# Altium PCB MCU_V2.PcbDoc
Units mm, origin at the board's own origin, x right, y up, seen from the top; angles counter-clockwise.
Board outline 47.6 x 56 mm, 2 copper layers (Top Layer, Bottom Layer); 61 components, 52 nets, 229 pads, 67 vias.
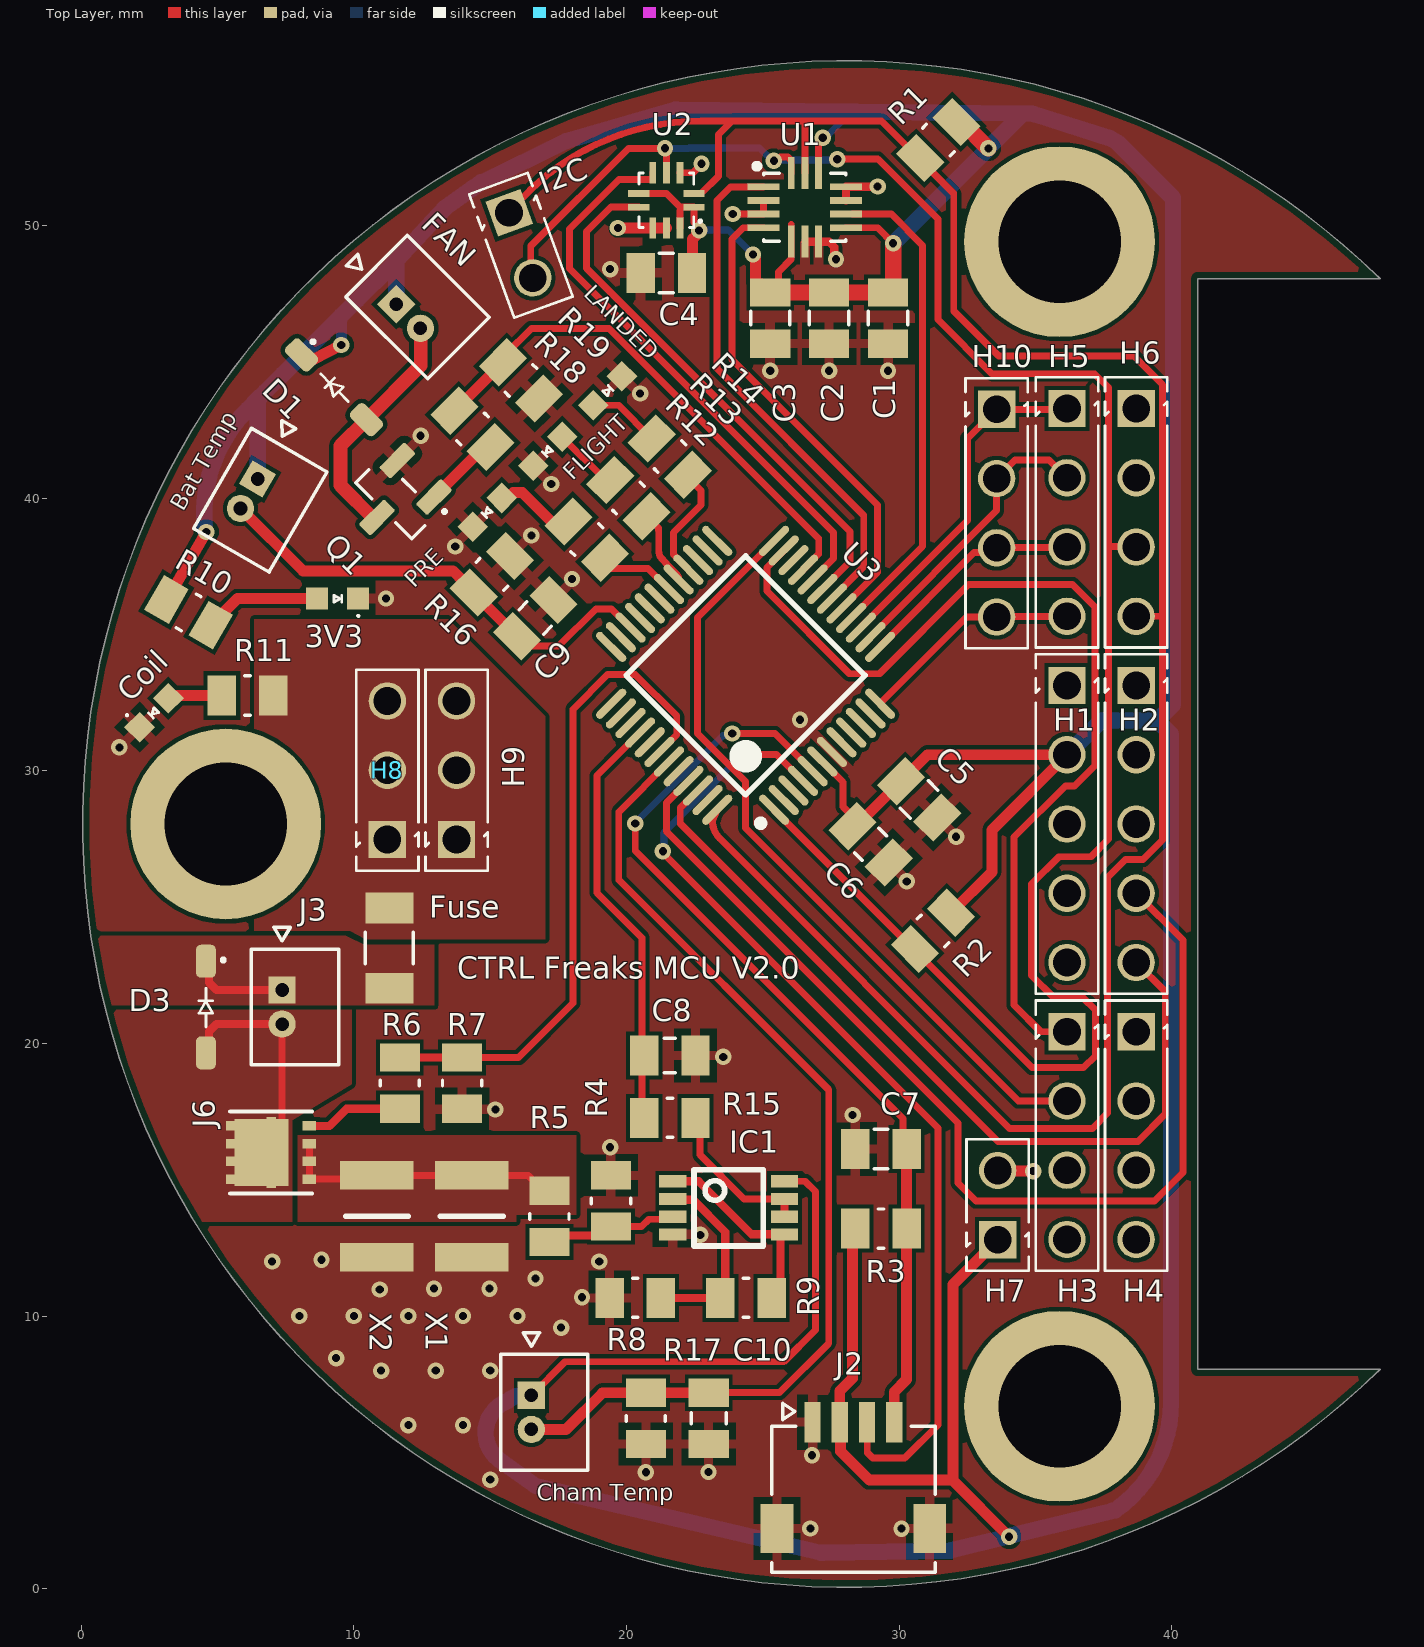
[diagram p0: Top Layer view]
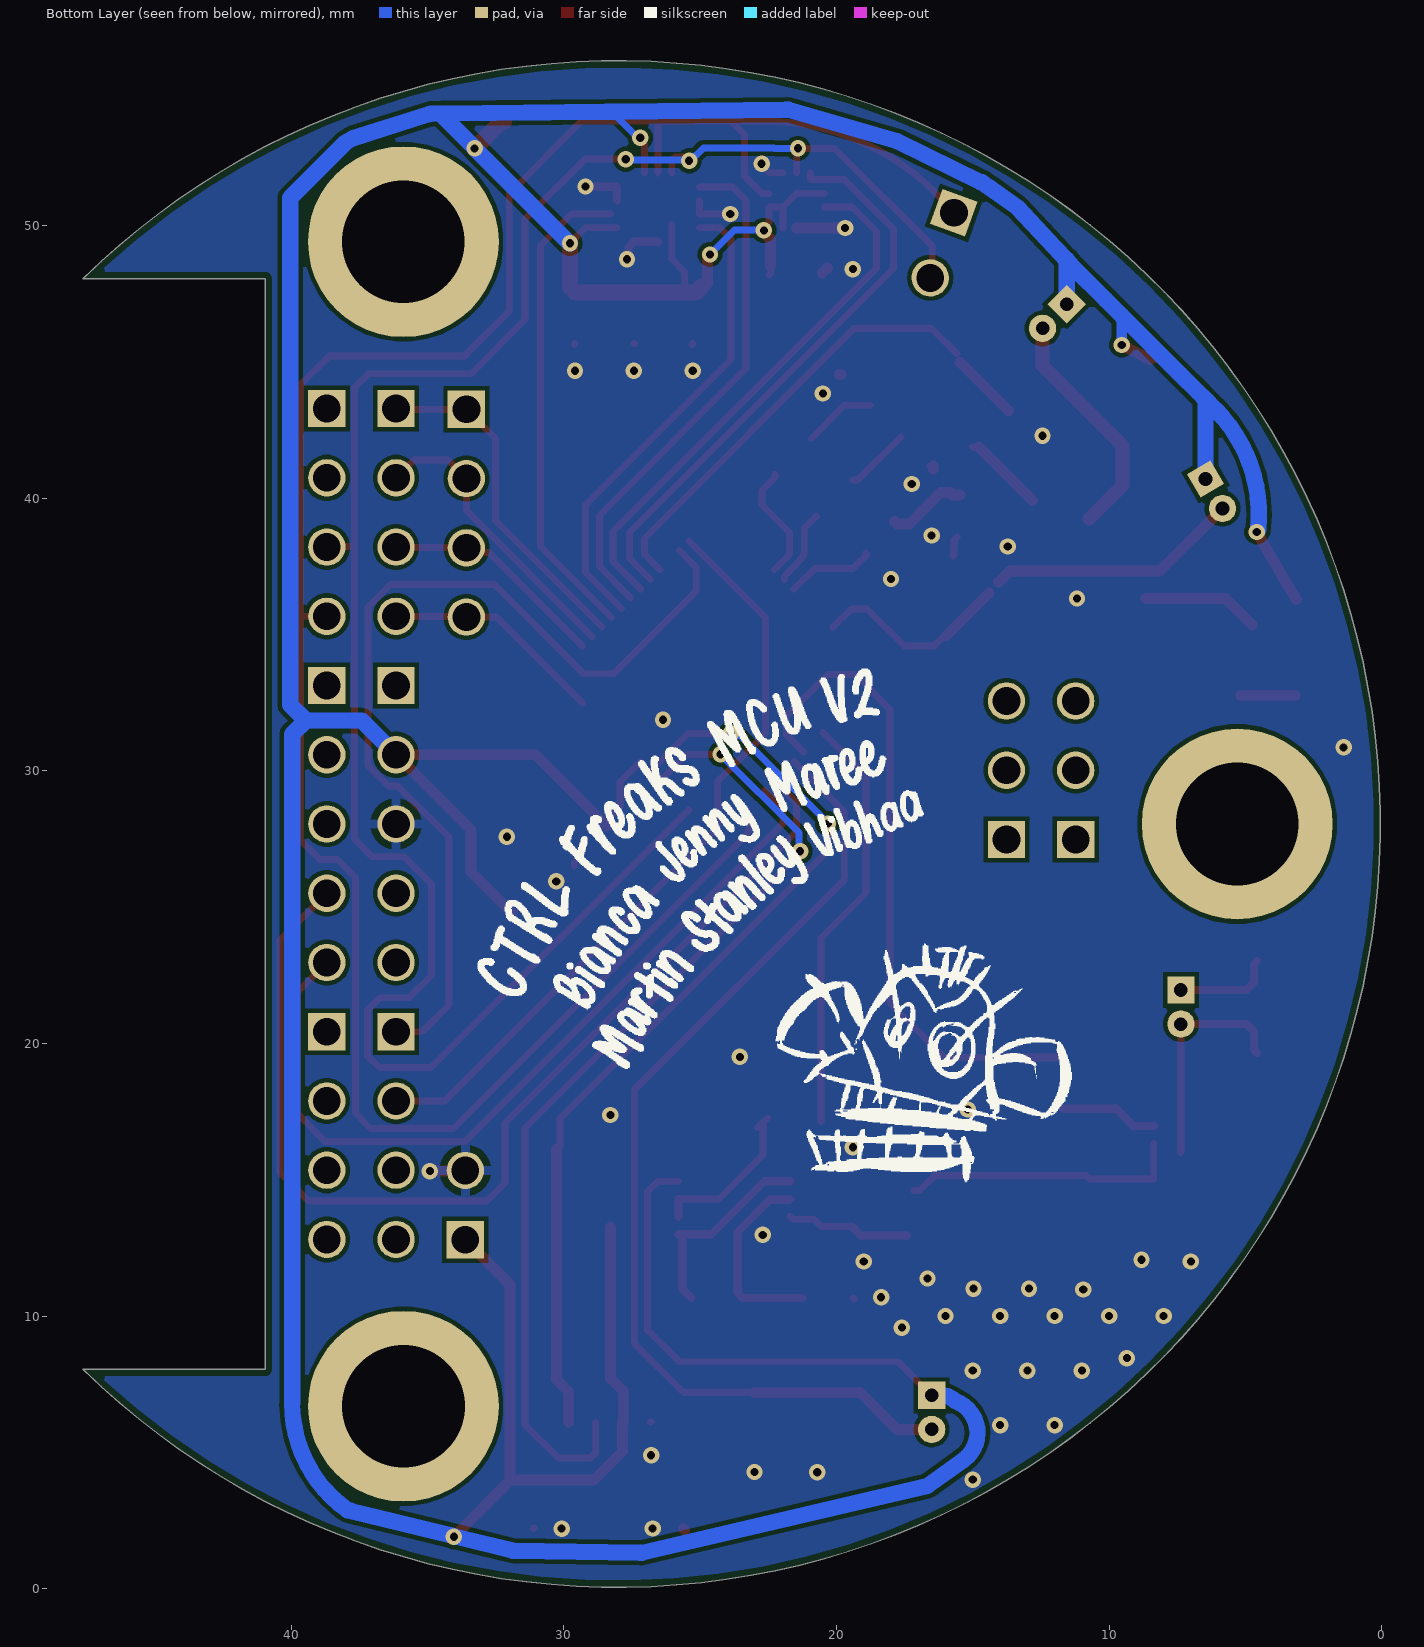
[diagram p1: Bottom Layer view, seen from below]
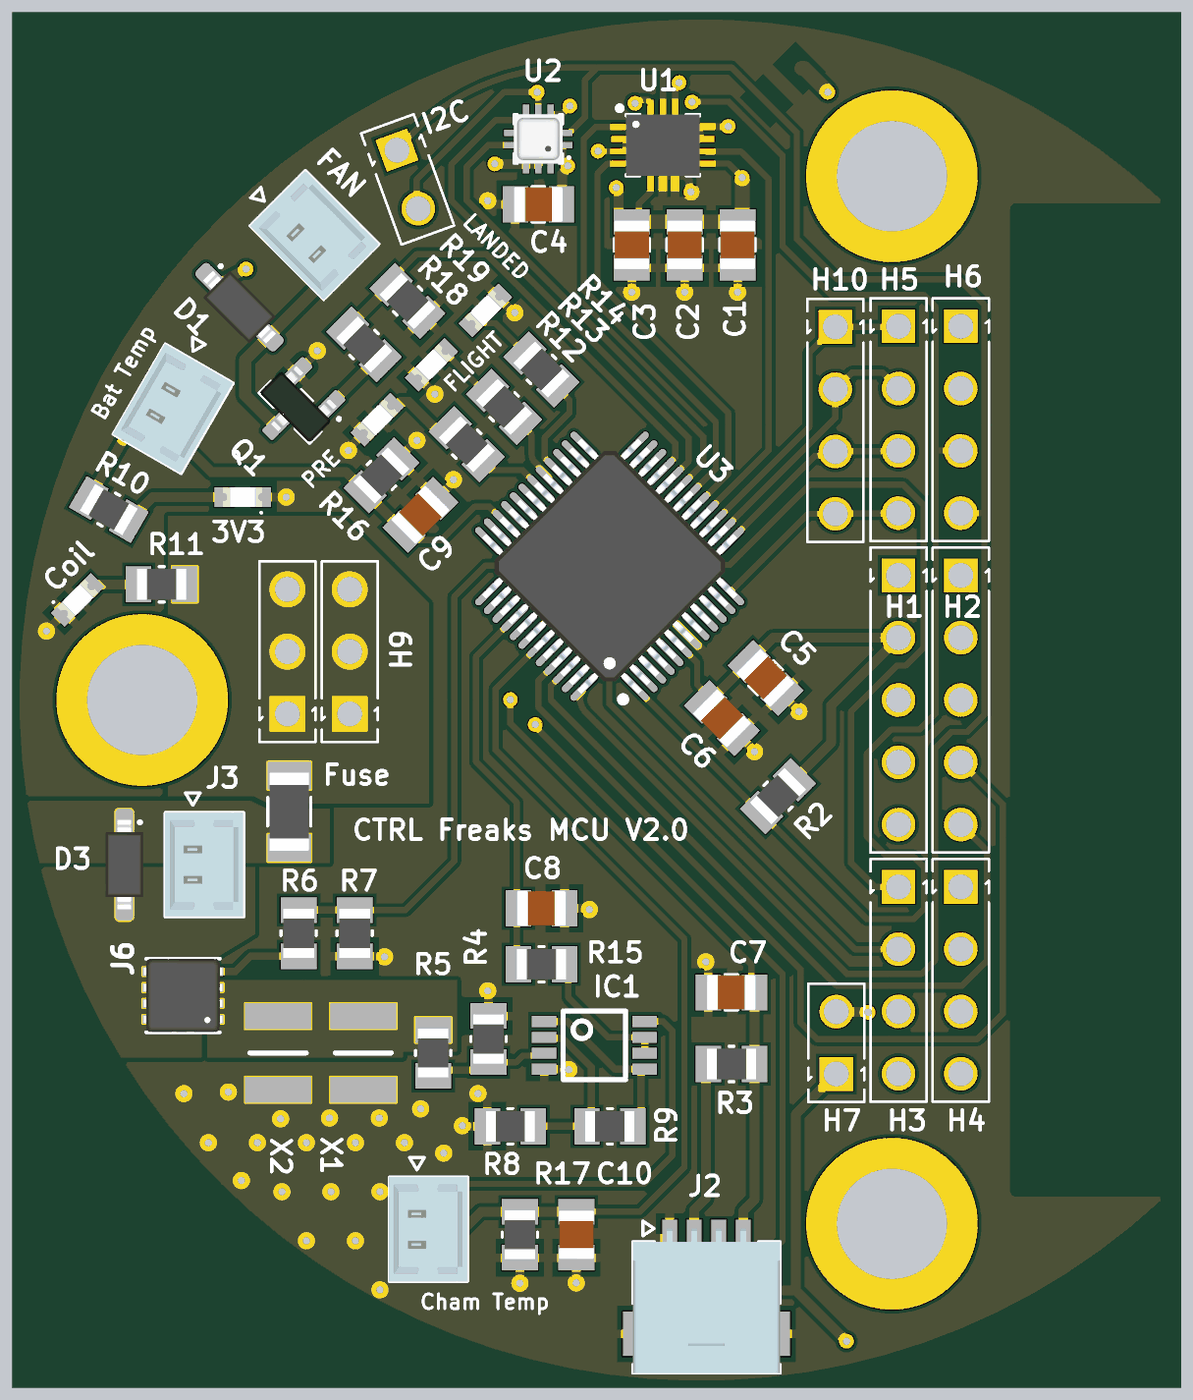
[diagram p2: 3D render of the assembled board from above, using the file's embedded part models]

## Layer stack, top to bottom
Top Solder: solder mask 0.0102, Solder Resist, Dk 3.5
Top Layer: signal copper 0.0356
Dielectric 1: dielectric 0.32, FR-4, Dk 4.8
Bottom Layer: signal copper 0.0356
Bottom Solder: solder mask 0.0102, Solder Resist, Dk 3.5

## Board outline
47.646,8.05 cw(c28.05,28.05) 47.646,48.05 47.65,48.05 40.963,48.05 40.963,8.05

## Design rules (kind name [scope] priority, off if disabled: settings)
BoardOutlineClearance [All] p1: gap=0.254 ignorepadtopadclearanceinfootprint=FALSE except(0: Arc-SplitContinuation Track-SplitContinuation SMDPad-SplitContinuation THPad-SplitContinuation Via-SplitContinuation Fill-SplitContinuation Poly-SplitContinuation Region-SplitContinuation Text-SplitContinuation)
Clearance [All] p1: gap=0.152 ignorepadtopadclearanceinfootprint=FALSE
ComponentClearance [All] p1: gap=0.1 collisioncheckmode=3 verticalgap=0.254 showdistances=FALSE
HoleSize [All] p1: absolutevalues=TRUE maxlimit=6.2 minlimit=0.3 maxpercent=80.000 minpercent=20.000
MinimumAnnularRing [All] p1: minimumring=0.15
MinimumSolderMaskSliver [All] p1: minsoldermaskwidth=0.1
PolygonConnect GND_SHUNT_RES [(InNet('GND') AND InComponent('X1') OR InComponent('X2'))] p1: connectstyle=Direct reliefconductorwidth=0.254 reliefentries=4 polygonreliefangle="90 Angle" airgapwidth=0.254 // Direct connect for GND Net on SHUNT
PolygonConnect HIGH-CURRENT [(InNet('V_Coil') OR InNet('NetD3_C') OR InNet('NetD3_A') OR InNet('Isense'))] p2: connectstyle=Direct reliefconductorwidth=0.254 reliefentries=4 polygonreliefangle="90 Angle" airgapwidth=0.254 // CUSTOM
PolygonConnect ViaConnect [IsVia] p3: connectstyle=Direct reliefconductorwidth=0.254 reliefentries=4 polygonreliefangle="90 Angle" airgapwidth=0.254
PolygonConnect [All] p4: connectstyle=Relief reliefconductorwidth=0.35 reliefentries=4 polygonreliefangle="90 Angle" airgapwidth=0.254
RoutingVias [All] p1: holewidth=0.3 width=0.6 viastyle="Through Hole" minholewidth=0.3 minwidth=0.5 maxholewidth=1 maxwidth=5
SilkToSilkClearance [All] p1: silktosilkclearance=0.1
SilkToSolderMaskClearance [IsPad] p1: minsilkscreentomaskgap=0.1 clearancetoexposedcopper=TRUE
SolderMaskExpansion [All] p1: expansion=0.051 istentingtop=FALSE
SupplyNets "Schematic Supply Nets_1" [InNet('V_Coil')] p1: voltage=0.000
SupplyNets "Schematic Supply Nets_10" [InNet('LED_2')] p2: voltage=0.000
SupplyNets "Schematic Supply Nets_6" [InNet('LED_1')] p3: voltage=0.000
SupplyNets "Schematic Supply Nets" [InNet('LED_3')] p4: voltage=0.000
SupplyNets "Schematic Supply Nets_7" [InNet('3V3')] p5: voltage=0.000
SupplyNets "Schematic Supply Nets_3" [InNet('GND')] p6: voltage=0.000
Width [All] p1: maxlimit=25.4 minlimit=0.15 preferedwidth=0.254 minimp=50.000000 maximp=50.000000 favimp=50.000000
25 further rules are at their usual default settings.

## Components (designator, comment, footprint, x,y, rotation, side; value= is the part's Value field where it differs from the comment)
3V3 "LTST-C190 Series" LED_0603_1608M_0.80mm 9.398,36.322 r180 top
"Bat Temp" "0530470210" MOLEX_0530470210 6.155,40.165 r60 top (schematic designator J4)
C1 "0.1uF" CAPACITOR_0805_2012M-70N 29.59,46.609 r90 top
C2 "2.2 uF" CAPACITOR_0805_2012M-70N 27.432,46.609 r90 top
C3 "10 nF" CAPACITOR_0805_2012M-70N 25.273,46.609 r90 top
C4 "0.1uF" CAPACITOR_0805_2012M-70N 21.463,48.26 r0 top
C5 "100nF" CAPACITOR_0805_2012M-70N 30.734,28.956 r135 top
C6 "22uF" CAPACITOR_0805_2012M-70N 28.956,27.305 r135 top
C7 "1nF" CAPACITOR_0805_2012M-70N 29.337,16.129 r0 top
C8 "22uF" CAPACITOR_0805_2012M-70N 21.59,19.558 r180 top
C9 "22uF" CAPACITOR_0805_2012M-70N 16.653,35.603 r225 top
C10 "22uF" CAPACITOR_0805_2012M-70N 23.016,6.249 r90 top
"Cham Temp" "0530470210" MOLEX_0530470210 16.51,6.467 r90 top (schematic designator J5)
Coil "LTST-C190 Series" LED_0603_1608M_0.80mm 2.667,32.131 r45 top
D1 "1N4148W-TP" SOD123-1.35mm-N 9.271,44.069 r315 top
D3 "1N4148W-TP" SOD123-1.35mm-N 4.572,21.336 r270 top
FAN "0530470210" MOLEX_0530470210 11.999,46.675 r135 top (schematic designator J1)
FLIGHT "LTST-C190 Series" LED_0603_1608M_0.80mm 17.109,41.721 r45 top
Fuse "SF-1206HH10M-2" RESISTOR_1206_3216M_55N 11.303,23.495 r90 top
H1 "HDR,2.54mm,1x5" HEADER_2.54MM_1x5PIN 36.157,28.05 r270 top locked
H2 "HDR,2.54mm,1x5" HEADER_2.54MM_1x5PIN 38.697,28.05 r270 top locked
H3 "HDR,2.54mm,1x4" HEADER_2.54MM_1x4PIN 36.157,16.62 r270 top locked
H4 "HDR,2.54mm,1x4" HEADER_2.54MM_1x4PIN 38.697,16.62 r270 top locked
H5 "HDR,2.54mm,1x4" HEADER_2.54MM_1x4PIN 36.157,39.48 r270 top locked
H6 "HDR,2.54mm,1x4" HEADER_2.54MM_1x4PIN 38.697,39.48 r270 top locked
H7 "HDR,2.54mm,1x2" HEADER_2.54MM_1x2PIN 33.617,14.072 r90 top locked
H8 "HDR,2.54mm,1x3" HEADER_2.54MM_1x3PIN 11.226,30.022 r90 top locked
H9 "HDR,2.54mm,1x3" HEADER_2.54MM_1x3PIN 13.766,30.022 r90 top
H10 "HDR,2.54mm,1x4" HEADER_2.54MM_1x4PIN 33.578,39.452 r270 top locked
I2C "HDR,2.54mm,1x2" HEADER_2.54MM_1x2PIN 16.129,49.276 r290 top
IC1 "NCS2333DMR2G" *MSOP8 23.749,13.97 r270 top
J2 "5015680407" MOLEX_5015680407 28.321,3.556 r0 top
J3 "0530470210" MOLEX_0530470210 7.366,21.336 r90 top
J6 "AON7524" DFN3X3A-8LEP1 6.964,16.002 r90 top
LANDED "LTST-C190 Series" LED_0603_1608M_0.80mm 19.304,43.942 r225 top
PRE "LTST-C190 Series" LED_0603_1608M_0.80mm 14.895,39.48 r45 top
Q1 "AS2312" SOT23-3N-1.15mm 11.557,40.005 r225 top
R1 "4.7k" Resistor_0805_2012M-50N 31.441,53.142 r45 top
R2 "4.7k" Resistor_0805_2012M-50N 31.242,24.13 r45 top
R3 "47k" Resistor_0805_2012M-50N 29.337,13.208 r180 top
R4 "*" RESISTOR_0805_2012M-50N 19.431,14.224 r90 top
R5 "*" RESISTOR_0805_2012M-50N 17.171,13.659 r90 top
R6 "*" RESISTOR_0805_2012M-50N 11.684,18.542 r270 top
R7 "*" RESISTOR_0805_2012M-50N 13.97,18.542 r90 top
R8 "*" RESISTOR_0805_2012M-50N 20.32,10.668 r180 top
R9 "*" RESISTOR_0805_2012M-50N 24.384,10.668 r0 top
R10 "*" RESISTOR_0805_2012M-50N 3.937,35.814 r150 top
R11 "*" RESISTOR_0805_2012M-50N 6.096,32.766 r0 top
R12 "*" RESISTOR_0805_2012M-50N 18.542,38.481 r315 top
R13 "*" RESISTOR_0805_2012M-50N 20.066,40.005 r315 top
R14 "*" RESISTOR_0805_2012M-50N 21.59,41.529 r315 top
R15 "*" Resistor_0805_2012M-50N 21.59,17.272 r180 top
R16 "10k" RESISTOR_0805_2012M-50N 15.062,37.211 r225 top
R17 "*" RESISTOR_0805_2012M-50N 20.709,6.249 r90 top
R18 "*" RESISTOR_0805_2012M-50N 14.351,42.545 r315 top
R19 "*" RESISTOR_0805_2012M-50N 16.129,44.323 r135 top
U1 "ICM-42670-P" XDCR_ICM-42670-P-EXTENDED_PADS 26.543,50.673 r0 top
U2 "BMP390" BMP390 21.462,50.927 r270 top
U3 "MSP430FR2355TPT" LQFP_PT_48_N 24.371,33.505 r135 top
X1 "RCWE1210R100FKEA" RESC3125X70N 14.321,13.659 r90 top
X2 "RCWE1210R100FKEA" RESC3125X70N 10.846,13.659 r90 top

## Footprints (in the part's own frame and the unit in brackets; to place one, negate y for a bottom-side part, rotate by r counter-clockwise, add the part's x,y. Pads: shape width x height; smd on the part's side, far side on the other; paste and mask are expansions set on the pad)
*MSOP8 [mm]
  rect 0.45x1 smd: 1(-0.975,-2.05) 2(-0.325,-2.05) 3(0.325,-2.05) 4(0.975,-2.05) 5(0.975,2.05) 6(0.325,2.05) 7(-0.325,2.05) 8(-0.975,2.05)
  silkscreen extent -1.4,-1.27 1.4,1.27
BMP390 [mm]
  rect 0.25x0.775 smd mask+0.051: 1(0.25,1.013) 2(-0.25,1.013) 6(-0.25,-1.013) 7(0.25,-1.013)
  rect 0.775x0.25 smd mask+0.051: 3(-1.013,0.5) 4(-1.013,0) 5(-1.013,-0.5) 8(1.013,-0.5) 9(1.013,0) 10(1.013,0.5)
  silkscreen extent -1,-1 1,1.29, body extent -1,-1 1,1, height 0.8
CAPACITOR_0805_2012M-70N [mm] "Capacitor, 0805 (2012 metric), 0.7mm high, nominal pads,"
  rect 1.04x1.47 smd mask+0.051: 1(-0.94,0) 2(0.94,0)
  silkscreen extent -0.25,-0.72 0.25,0.72, body extent -1,-0.73 1,0.73, height 1.23
DFN3X3A-8LEP1 [mm]
  rect 0.35x0.5 smd: P$1(-0.975,-1.4) P$2(-0.325,-1.4) P$3(0.325,-1.4) P$4(0.975,-1.4) P$5(0.975,1.4) P$6(0.325,1.4) P$7(-0.325,1.4) P$8(-0.975,1.4)
  rect 0.5x0.35 smd: P$9(1.05,0) P$10(-1.05,0)
  rect 2.45x1.98 smd: P$11(0,0.36)
  silkscreen extent -1.5,-1.5 1.5,1.5, body extent -1.55,-1.6 1.55,1.6, height 0.9
HEADER_2.54MM_1x2PIN [mm]
  rect 1.37x1.37 hole 1.02: 1(-1.27,0)
  round 1.37 hole 1.02: 2(1.27,0)
  silkscreen extent -2.41,-1.14 2.41,1.14, body extent -2.41,-1.14 2.41,1.14, height 8.2
HEADER_2.54MM_1x3PIN [mm]
  rect 1.37x1.37 hole 1.02: 1(-2.54,0)
  round 1.37 hole 1.02: 2(0,0) 3(2.54,0)
  silkscreen extent -3.68,-1.14 3.68,1.14, body extent -3.68,-1.14 3.68,1.14, height 8.2
HEADER_2.54MM_1x4PIN [mm]
  rect 1.37x1.37 hole 1.02: 1(-3.81,0)
  round 1.37 hole 1.02: 2(-1.27,0) 3(1.27,0) 4(3.81,0)
  silkscreen extent -4.95,-1.14 4.95,1.14, body extent -4.95,-1.14 4.95,1.14, height 8.2
HEADER_2.54MM_1x5PIN [mm]
  rect 1.37x1.37 hole 1.02: 1(-5.08,0)
  round 1.37 hole 1.02: 2(-2.54,0) 3(0,0) 4(2.54,0) 5(5.08,0)
  silkscreen extent -6.22,-1.14 6.22,1.14, body extent -6.21,-1.14 6.22,1.14, height 8.2
LED_0603_1608M_0.80mm [mm] "LED, 0603 (1608 metric), 0.8mm high"
  rect 0.8x0.8 smd mask+0.051: A(0.75,0) C(-0.75,0)
  silkscreen extent -0.79,-0.12 0.13,0.66, body extent -0.8,-0.4 0.8,0.4, height 0.8
LQFP_PT_48_N [mm]
  oval 1.45x0.28 smd paste+0 mask+0.051: 1(-4.225,2.75) 2(-4.225,2.25) 3(-4.225,1.75) 4(-4.225,1.25) 5(-4.225,0.75) 6(-4.225,0.25) 7(-4.225,-0.25) 8(-4.225,-0.75) 9(-4.225,-1.25) 10(-4.225,-1.75) 11(-4.225,-2.25) 12(-4.225,-2.75) 25(4.225,-2.75) 26(4.225,-2.25) 27(4.225,-1.75) 28(4.225,-1.25) 29(4.225,-0.75) 30(4.225,-0.25) 31(4.225,0.25) 32(4.225,0.75) 33(4.225,1.25) 34(4.225,1.75) 35(4.225,2.25) 36(4.225,2.75)
  oval 0.28x1.45 smd paste+0 mask+0.051: 13(-2.75,-4.225) 14(-2.25,-4.225) 15(-1.75,-4.225) 16(-1.25,-4.225) 17(-0.75,-4.225) 18(-0.25,-4.225) 19(0.25,-4.225) 20(0.75,-4.225) 21(1.25,-4.225) 22(1.75,-4.225) 23(2.25,-4.225) 24(2.75,-4.225) 37(2.75,4.225) 38(2.25,4.225) 39(1.75,4.225) 40(1.25,4.225) 41(0.75,4.225) 42(0.25,4.225) 43(-0.25,4.225) 44(-0.75,4.225) 45(-1.25,4.225) 46(-1.75,4.225) 47(-2.25,4.225) 48(-2.75,4.225)
  silkscreen extent -4.35,-3.1 3.1,3.57, body extent -4.5,-4.5 4.5,4.5, height 1.6
MOLEX_0530470210 [mm]
  rect 1x1 hole 0.5 mask+0.051: 1(0.625,0)
  round 1 hole 0.5 mask+0.051: 2(-0.625,0)
  silkscreen extent -2.12,-2.08 2.93,1.12, body extent -2.12,-2.06 2.13,1.14, height 4.21
MOLEX_5015680407 [mm] "Header - Picoclasp 04-pin, SMT, RA, 3.2mm height"
  rect 0.6x1.5 smd mask+0.076: 1(-1.5,2.55) 2(-0.5,2.55) 3(0.5,2.55) 4(1.5,2.55)
  rect 1.2x1.8 smd mask+0.076: MP1(2.8,-1.35) MP2(-2.8,-1.35)
  silkscreen extent -3,-2.95 3,3.25, body extent -3,-2.95 3,2.95, height 3.19
RESC3125X70N [mm]
  rect 1.05x2.7 smd: 1(-1.5,0) 2(1.5,0)
  silkscreen extent 0,-1.15 0,1.15
Resistor_0805_2012M-50N [mm] "Resistor, 0805 (2012 metric), nominal pads"
  rect 1.04x1.47 smd mask+0.051: 1(-0.94,0) 2(0.94,0)
  silkscreen extent -0.1,-0.72 0.1,0.72, body extent -1,-0.63 1,0.62, height 0.5
RESISTOR_0805_2012M-50N [mm] "Resistor, 0805 (2012 metric), nominal pads"
  rect 1.04x1.47 smd mask+0.051: 1(-0.94,0) 2(0.94,0)
  silkscreen extent -0.1,-0.72 0.1,0.72, body extent -1,-0.63 1,0.62, height 0.5
RESISTOR_1206_3216M_55N [mm]
  rect 1.13x1.77 smd mask+0.051: 1(-1.47,0) 2(1.47,0)
  silkscreen extent -0.58,-0.88 0.58,0.88, body extent -1.6,-0.8 1.6,0.8, height 0.65
SOD123-1.35mm-N [mm] "SOD-123, 1.35mm high, nominal pads"
  rrect50% 1.21x0.73 smd mask+0.051: A(1.68,0) C(-1.68,0)
  silkscreen extent -1.75,-0.25 0.74,0.66, body extent -1.83,-0.78 1.82,0.77, height 1.5
SOT23-3N-1.15mm [mm] "SOT23, 3-pin, 1.15mm high, nominal pads"
  rrect25% 1.32x0.6 smd mask+0.051: 1(-1,0.95) 2(-1,-0.95) 3(1,0)
  silkscreen extent -0.93,-1.45 0.65,1.63, body extent -1.19,-1.45 1.21,1.45, height 0.91
XDCR_ICM-42670-P-EXTENDED_PADS [mm]
  rect 1.175x0.25 smd paste-1 mask+0.05: 1(-1.512,0.75) 2(-1.512,0.25) 3(-1.512,-0.25) 4(-1.512,-0.75) 8(1.512,-0.75) 9(1.512,-0.25) 10(1.512,0.25) 11(1.512,0.75)
  rect 0.25x1.175 smd paste-1 mask+0.05: 5(-0.5,-1.262) 6(0,-1.262) 7(0.5,-1.262) 12(0.5,1.262) 13(0,1.262) 14(-0.5,1.262)
  silkscreen extent -1.86,-1.25 1.5,1.6, body extent -1.5,-1.25 1.5,1.25, height 0.81

## Part data
3V3 Coil FLIGHT LANDED PRE: "Diode - LED, 0603", Package=0603, Rated Voltage="5V Reverse", Temp Range="-30°C ~ 85°C", APSS Standard Part="APSS Standard", Supplier 1=Digikey
"Bat Temp" "Cham Temp" FAN J3: "Connector - Picoblade 02-pin, TH, STR", Supplier 1 Part No.=WM1731-ND, APSS Standard Part="APSS Standard", MF Part No.=0530470210, Mounting Type=Through-hole, Orientation=Straight, Pins=2, Pitch=1.25mm, Supplier 1=Digikey
C1 C2 C3 C4 C5: library part "Generic Capacitor", "Generic Capacitor", Capacitance at Rated Voltage=40%, MF Part No.=C0805C104K5RAC7800, Package=0805, Rated Voltage=50V, Supplier 1 Part No.=399-C0805C104K5RAC7800CT-ND, Temp Range="-55°C ~ 125°C", Temperature Coefficient=X7R, Tolerance=±10%, Supplier 1=Digikey
C6: library part C0805C226M9PACTU, "Passive - Capacitor, X5R, 22uF Max, 6.3V, 0805 (2012 Metric), ±20%, -55°C ~ 85°C. 8.8uF @ 5V", Capacitance at Rated Voltage=30%, Package=0402, Rated Voltage=6.3V, Supplier 1 Part No.=399-C0805C226M9PAC7800CT-ND, Temp Range="-55°C ~ 85°C", Temperature Coefficient=X5R, Tolerance=±20%, APSS Standard Part="APSS Standard", MF Part No.=C0805C226M9PACTU, Supplier 1=Digikey
C7: library part "Generic Capacitor", "Generic Capacitor", Capacitance at Rated Voltage=100%, MF Part No.=399-C0805C102J5GAC7800CT-ND, Package=0805, Rated Voltage=50V, Temp Range="-55°C ~ 125°C", Temperature Coefficient=X7R, Tolerance=±5%, Supplier 1=Digikey, Supplier 1 Part No.=399-C0805C102J5GAC7800CT-ND
C8 C9 C10: library part C0805C226M9PACTU, "Passive - Capacitor, X5R, 22uF Max, 6.3V, 0805 (2012 Metric), ±20%, -55°C ~ 85°C. 8.8uF @ 5V", Capacitance at Rated Voltage=30%, Package=0805, Rated Voltage=6.3V, Supplier 1 Part No.=399-C0805C226M9PAC7800CT-ND, Temp Range="-55°C ~ 85°C", Temperature Coefficient=X5R, Tolerance=±20%, APSS Standard Part="APSS Standard", MF Part No.=C0805C226M9PACTU, Supplier 1=Digikey
D1 D3: "Diode - Low Reverse Leakage, 1.25 Vf @ 150 mA, 1 µA Reverse @ 75 V, SOD-123", Package=SOD-123, Rated Voltage="100V Reverse", Supplier 1 Part No.=1N4148WTPMSCT-ND, Temp Range="-65°C ~ 150°C", APSS Standard Part="APSS Standard", MF Part No.=1N4148W-TP, Supplier 1=Digikey
Fuse R4 R5 R6 R7 R8 R9 R10 R11 R12 R13 R14 R15 R16 R17 R18 R19: library part "Generic Resistor", "Passive - Resistor, Generic", Tolerance=?%
H1 H2: "Connector - 2.54mm, 1x5-pin"
H3 H4 H5 H6 H10: "Connector - 2.54mm, 1x4-pin"
H7 I2C: "Connector - 2.54mm, 1x2-pin"
H8 H9: "Connector - 2.54mm, 1x3-pin"
J2: "Connector - Picoclasp  04-pin, SMT, RA", Supplier 1 Part No.=WM7895CT-ND, APSS Standard Part="APSS Standard", MF Part No.=5015680407, Mounting Type="Surface Mount", Orientation=Straight, Pins=4, Pitch=1mm, Supplier 1=Digikey
J6: "N-Channel 30 V 25A (Ta), 28A (Tc) 3.1W (Ta), 32W (Tc) Surface Mount 8-DFN-EP (3x3)", Package="DFN-8 Alpha &amp;", Check_prices=https://www.snapeda.com/parts/AON7524/Alpha/view-part/?ref=eda, MF="Alpha &", MP=AON7524, SnapEDA_Link=https://www.snapeda.com/parts/AON7524/Alpha/view-part/?ref=snap
Q1: "Transistor - MOSFET, N-Channel AS2312", Package=SOT-23-3, Power=1.2W, Rated Voltage="20 Vds", Supplier 1 Part No.=4530-AS2312CT-ND, Temp Range="0°C ~ 150°C (TJ)", APSS Standard Part="APSS Standard", MF Part No.=AS2312, Supplier 1=Digikey
R1 R2: library part "RMCF0805JT Series", "Passive - Resistor Series, 0805, 5%, 100m - 22M, E24, 0.063W, 1/16W, ±200ppm/°C, -55°C ~ 155°C, 0805 (2012 Metric)", MF Part No.=RMCF0805JT4K70, Package=0805, Power=1/8W, Rated Voltage=150V, Temp Range="-55°C ~ 155°C", Temperature Coefficient=±200ppm/°C, Tolerance=5%, Value Range="100m ~ 22M", APSS Standard Part="APSS Standard", E Series=E24, Supplier 1=Digikey
R3: library part "RMCF0805JT Series", "Passive - Resistor Series, 0805, 5%, 100m - 22M, E24, 0.063W, 1/16W, ±200ppm/°C, -55°C ~ 155°C, 0805 (2012 Metric)", MF Part No.=RMCF0805JT47K0, Package=0805, Power=1/8W, Rated Voltage=150V, Temp Range="-55°C ~ 155°C", Temperature Coefficient=±200ppm/°C, Tolerance=5%, Value Range="100m ~ 22M", APSS Standard Part="APSS Standard", E Series=E24, Supplier 1=Digikey
U1: "IC - Inertial Management Unit: Accelerometer + Gyro + Temperature Sensor, 6 Axis, I2C / I3C / SPI Interfaces", Package=14-LGA, Rated Voltage=3.6V, Supplier 1 Part No.=1428-ICM-42670-PCT-ND, Temp Range="-40°C ~ 85°C", APSS Standard Part="APSS Standard", MF Part No.=ICM-42670-P, Supplier 1=Digikey
U2: "Digital Pressure Sensor", Package=LGA, Supplier 1 Part No.=828-BMP390CT-ND, Temp Range="-40°C ~ 85°C", APSS Standard Part="APSS Standard", MF Part No.=BMP390, Pins=10, Pressure Range="30 kPa ~ 125 kPa", Supplier 1=Digikey
U3: "IC - Microcontroller, LQFP-48, 24MHz, 32KB FRAM, Op-Amps/PGAs, 12-bit DACs, 12-bit ADC, -40 to 105C", Package=LQFP-48, Rated Voltage=3.6V, Supplier 1 Part No.=296-50260-ND, Temp Range="-40°C ~ 105°C", APSS Standard Part="APSS Standard", MF Part No.=MSP430FR2355TPT, Supplier 1=Digikey
X1 X2: "Res Thick Film 1210 0.1 Ohm 1% 1W +/-100ppm/C Sulfur Resistant Pad SMD Automotive T/R", Manufacturer_Name=Vishay, Mouser Part Number=71-RCWE1210R100FKEA, Datasheet Link=https://www.arrow.com/en/products/rcwe1210r100fkea/vishay?region=nac, Geometry.Height=0.7mm, Manufacturer_Part_Number=RCWE1210R100FKEA, Mouser Price/Stock=https://www.mouser.co.uk/ProductDetail/Vishay-Dale/RCWE1210R100FKEA?qs=ky7aQRddhuh3IQZv%2FTVUyQ%3D%3D
IC1: Check_prices=https://www.snapeda.com/parts/NCS2333DMR2G/Onsemi/view-part/?ref=eda, SnapEDA_Link=https://www.snapeda.com/parts/NCS2333DMR2G/Onsemi/view-part/?ref=snap

## Free pads (board coordinates)
  round 7 hole 4.5: 1(5.3,28.05) 1(35.887,6.693) 1(35.887,49.407)

## Via types
v1: diameter 0.6, hole 0.3, Top Layer to Bottom Layer, 67 vias

## Nets (pads, with @x,y where several pads share a name; then routed paths per layer and width w, separated by ;. In a path a pad name is that pad's centre, name@x,y a point inside that pad or via, vN(x,y) a via of type N, cw(c..) or ccw(c..) an arc to the next point about the centre after c; other vN are vias at no path point)
3V3: "Bat Temp.1" "Cham Temp.1" C1.2 C2.2 C3.2 C4.2 C5.2 C6.2 D1.C FAN.1 H1.2 H7.1 IC1.8 J2.2 R1.2 R2.2 R3.2 R10.2 U1.5 U1.8 U1.12 U2.1 U2.6 U2.10 U3.6 | length 229.5
  Top Layer w0.254: 16.51,7.092 17.742,8.324 25.768,8.324 26.931,9.487 26.931,14.565 26.551,14.945 IC1.8 ; U2.6 21.467,51.177 21.967,50.677 ; U2.10 21.962,50.554 ; 21.962,50.677 21.967,50.677 ; C4.2 C4.2@22.478,48.185 ; v1(22.664,49.826) 22.664,49.92 22.475,50.109 U2.1 21.967,50.677 ; C3.2 25.4,47.549 25.568,47.717 25.568,48.301 26.043,48.776 U1.5 26.043,50.049 ; U1.12 27.043,52.97 27.201,53.128 v1(27.201,53.222) ; U3.6 27.94,29.582 27.94,28.682 28.291,28.331 C6.2 C6.2@28.418,27.97 ; U1.8 29.208,49.923 v1(29.778,49.353) ; C1.2 C1.2@29.778,47.737 ; R1.2 R1.2@32.213,53.806
  Top Layer w0.4: R10.2 3.45,36.797 v1(4.586,38.764) ; D1.C 8.511,45.087 v1(9.539,45.622) ; C4.2@22.427,48.513 22.427,49.509 22.541,49.623 22.541,49.649 22.664,49.772 v1(22.664,49.826) ; v1(24.64,48.943) 24.64,48.889 24.738,48.791 24.738,47.869 24.838,47.769 C3.2@24.936,47.769 ; J2.2 27.821,7.247 28.293,7.719 R3.2@28.293,13.254 ; J2.2@27.853,6.106 27.853,5.04 28.913,3.98 31.961,3.98 31.971,3.97 ; C6.2@28.418,27.97 C5.2 31.039,30.59 H1.2 33.401,27.834 33.401,26.289 R2.2 ; H7.1@33.623,12.795 33.611,12.795 31.971,11.156 31.971,3.97 ; v1(34.036,1.905) 31.971,3.97
  Top Layer w0.6: C3.2@24.936,47.769 25.156,47.549 C3.2 ; C3.2@25.4,47.549 C2.2 C1.2 ; C1.2@29.778,47.737 v1(29.778,49.353) ; R1.2@32.213,53.806 32.3,53.806 v1(33.274,52.832)
  Bottom Layer w0.254: 9.539,46.692 10.125,47.279 ; 11.557,48.759 12.004,49.206 ; v1(22.664,49.826) 22.673,49.836 23.747,49.836 v1(24.64,48.943) ; v1(27.201,53.222) 27.295,53.222 27.573,53.5 27.576,53.5 28.115,54.039
  Bottom Layer w0.4: v1(9.539,45.622) 9.539,46.692
  Bottom Layer w0.6: v1@4.535,38.84 cw(c9.958,39.401) 6.108,43.261 6.467,43.62 ; 6.467,40.707 6.467,43.62 ; FAN.1 11.557,48.759 ; 16.51,7.092 16.15,7.092 ccw(c16.15,6.38) 15.646,6.883 ccw(c16.064,5.722) 15.352,4.713 15.354,4.712 16.669,3.767 27.136,1.318 27.21,1.318 27.215,1.318 31.877,1.397 34.031,1.925 34.036,1.926 37.825,2.854 37.939,2.882 ccw(c35.163,6.807) 39.971,6.807 39.971,6.809 39.971,31.337 39.464,31.844 ; v1(29.778,49.353) 29.795,49.353 v1(33.274,52.832) 33.274,52.848 34.508,54.083 ; H1.2 37.411,31.844 39.464,31.844 ; 6.467,43.62 6.749,43.902 ; 6.467,43.62 6.749,43.902 ; 6.749,43.902 7.389,44.542 9.539,46.692 10.125,47.279 11.331,48.484 11.573,48.744 12.004,49.206 13.369,50.67 14.403,51.409 14.483,51.453 14.663,51.595 14.705,51.595 17.767,53.096 21.764,54.247 21.851,54.247 21.855,54.247 28.116,54.181 28.449,54.177 34.509,54.113 34.878,54.11 34.963,54.083 37.766,53.197 38.01,53.049 40.044,51.015 40.044,32.424 39.464,31.844
3V3_PG: H2.2
BMP_ADR: U2.5 U3.20 | length 21.2
  Top Layer w0.254: U2.5 20.962,51.691 20.96,51.689 19.722,51.689 17.916,49.883 17.916,48.425 27.595,38.746 27.595,37.789 U3.20
BMP_INT: U2.7 U3.19 | length 19.8
  Top Layer w0.254: U2.7 19.426,50.677 18.535,49.786 18.535,48.436 28.194,38.778 28.194,37.682 U3.19
Buck_PG: H2.1
EN_BOOST: H2.4 U3.45 | length 39.4
  Top Layer w0.254: U3.45 21.463,28.829 21.463,27.772 32.155,17.08 32.155,14.885 32.816,14.224 39.37,14.224 40.411,15.265 40.411,23.796 H2.4
EN_BUCK: H2.5 U3.46 | length 30.5
  Top Layer w0.254: U3.46 21.971,28.63 21.971,28.07 33.635,16.406 38.758,16.406 39.762,17.41 39.762,21.905 H2.5
FlashCS: U3.10
FlashWP: U3.11
GND: 3V3.C C1.1 C2.1 C3.1 C4.1 C5.1 C6.1 C7.1 C8.1 C9.1 C10.1 Coil.C FLIGHT.C H1.3 H7.2 IC1.4 J2.1 J2.MP1 J2.MP2 LANDED.C PRE.C Q1.2 R4.2 R7.1 R8.2 R16.1 R17.1 R19.1 U1.2 U1.3 U1.6 U1.7 U1.10 U1.11 U2.3 U2.8 U2.9 U3.7 X1.1 X2.1 | length 10.8
  Top Layer w0.254: R16.1@15.575,38.583 15.687,38.471 15.687,37.915 R16.1 ; FLIGHT.C@16.452,41.191 FLIGHT.C ; R8.2@19.338,10.626 R8.2 ; LANDED.C LANDED.C@19.834,44.539 ; U2.3 22.44,51.94 22.749,52.249 v1(22.749,52.27) ; v1(23.901,50.429) 23.904,50.425 25.029,50.425 U1.3 U1.2 ; C3.1 C3.1@25.302,45.64 ; J2.MP2 J2.MP2@25.568,2.159 ; J2.1@26.809,6.118 J2.1 ; C2.1@27.416,45.653 C2.1 ; C1.1 C1.1@29.617,45.642 ; C6.1@29.621,26.513 C6.1 ; J2.MP1@31.092,2.235 J2.MP1
  Top Layer w0.3: U1.6 U1.7 27.424,49.411 27.62,49.215 27.62,48.834 v1(27.686,48.768) ; U1.10 U1.11 28.057,51.425 29.2,51.425 v1(29.21,51.435)
  Top Layer w0.4: FLIGHT.C@16.452,41.064 FLIGHT.C@16.452,41.191 ; v1(19.685,49.911) v1(19.685,49.911) 20.96,49.912 U2.8 U2.9 ; LANDED.C@19.834,44.539 LANDED.C@19.901,44.539 ; C4.1@20.332,48.451 C4.1 ; J2.MP2@25.568,2.159 J2.MP2@25.606,2.197 ; H7.2@33.642,15.354 33.668,15.329 34.903,15.329 v1(34.916,15.315)
  other v1: 26.746,2.21 30.085,2.202 15,4 20.71,4.27 23.008,4.282 26.802,4.895 12,6 14,6 11,8 13,8 15,8 9.347,8.458 17.602,9.576 8,10 10,10 12,10 14,10 16,10 18.366,10.69 10.947,10.973 12.941,11.006 14.973,11.006 16.662,11.379 7,12 19,12 8.814,12.065 22.708,12.979 19.399,16.193 28.296,17.374 15.189,17.577 23.546,19.507 30.281,25.943 32.091,27.581 1.397,30.861 26.365,31.877 11.176,36.322 18,37.036 13.716,38.227 16.51,38.633 17.242,40.523 12.446,42.291 20.5,43.84 25.273,44.679 27.432,44.679 29.591,44.679 19.398,48.405
IMU_ADR: U1.1 U3.18 | length 19.2
  Top Layer w0.254: U1.1 25.029,51.421 23.808,51.421 23.313,50.926 23.313,44.759 28.702,39.37 28.702,37.492 U3.18@27.548,36.339
IMU_INT1: U1.4 U3.17 | length 17.6
  Top Layer w0.254: U1.4 24.295,49.923 23.876,49.504 23.876,45.085 29.21,39.751 29.21,37.283 U3.17
IMU_INT2: U1.9 U3.16 | length 17.8
  Top Layer w0.254: U3.16@28.255,35.632 30.861,38.237 30.861,49.276 29.718,50.419 U1.9@28.295,50.419
Isense: J6.P$1 J6.P$2 J6.P$3 R5.2 X1.2 X2.2 | length 10.4
  Top Layer w0.254: J6.P$3 J6.P$2 J6.P$1 10.714,15.027 X2.2 X1.2 16.396,15.159 16.956,14.599 R5.2
LED_1: R12.2 U3.30 | length 3.2
  Top Layer w0.254: R12.2@18.878,37.937 19.388,37.427 20.796,37.427 21.553,36.669 U3.30
LED_2: R13.2 U3.29 | length 2.8
  Top Layer w0.254: R13.2 21.17,38.901 21.181,38.816 cw(c20.93,38.782) 21.184,38.782 21.184,38.061 ccw(c21.59,38.061) 21.29,37.787 21.543,37.508 ccw(c21.854,37.79) 21.557,37.494 21.839,37.212 cw(c21.66,37.032) 21.876,37.165 U3.29@21.913,37.105 ; U3.29 U3.29@21.914,37.105
LED_3: R14.2 U3.28 | length 4.3
  Top Layer w0.254: R14.2 22.255,40.757 22.733,40.279 22.733,39.751 21.717,38.735 21.717,37.934 22.267,37.383 U3.28
Net3V3_A: 3V3.A R10.1 | length 4.3
  Top Layer w0.4: R10.1 5.729,36.322 3V3.A
NetCoil_A: Coil.A R11.1 | length 2
  Top Layer w0.4: Coil.A@3.187,32.766 R11.1
NetD1_A: D1.A FAN.2 Q1.3 | length 8.7
  Top Layer w0.5: Q1.3@10.731,39.249 9.509,40.471 9.509,41.931 D1.A 12.446,44.868 FAN.2@12.446,46.228
NetD3_A: D3.A J3.2 J6.P$5 J6.P$6 J6.P$7 J6.P$8 J6.P$9 J6.P$10 J6.P$11 | length 8.3
  Top Layer w0.254: J3.2 7.366,16.041 ccw(c7.421,16.041) J6.P$11@7.382,16.002
  Top Layer w0.3: D3.A 4.69,19.774 4.69,20.438 4.963,20.711 J3.2
NetD3_C: D3.C Fuse.1 J3.1 | length 3.6
  Top Layer w0.3: D3.C 4.69,22.898 4.69,22.234 4.963,21.961 J3.1
NetFLIGHT_A: FLIGHT.A R13.1 | length 2.4
  Top Layer w0.254: FLIGHT.A 19.221,40.67 R13.1
NetIC1_2: IC1.2 R8.1 R9.1 | length 7.1
  Top Layer w0.3: R8.1 R9.1 23.622,10.846 23.622,13.081 22.434,14.269 21.725,14.269 IC1.2
NetIC1_3: IC1.3 R4.1 R5.1 | length 4.6
  Top Layer w0.254: R4.1 20.551,13.284 20.818,13.551 21.605,13.551 IC1.3
  Top Layer w0.3: R5.1@17.415,12.954 19.101,12.954 R4.1
NetIC1_6: IC1.6 IC1.7 R15.1 | length 6.1
  Top Layer w0.254: R15.1 R15.1@22.69,17.112 ; R15.1@22.893,16.909 R15.1@22.69,17.112 ; IC1.7 24.313,14.295 22.69,15.918 R15.1@22.69,17.112
  Top Layer w0.3: IC1.6 IC1.7
NetJ6_P$4: J6.P$4 R6.2 | length 3.6
  Top Layer w0.3: J6.P$4 9.103,16.977 9.728,17.602 R6.2
NetLANDED_A: LANDED.A R14.1 | length 2.7
  Top Layer w0.254: LANDED.A 19.707,43.412 R14.1
NetPRE_A: PRE.A R12.1 | length 3
  Top Layer w0.4: PRE.A@15.477,40.124 15.76,40.124 15.846,40.211 16.177,40.211 17.334,39.054 17.786,39.054 R12.1
NetQ1_1: Q1.1 R18.2 | length 3
  Top Layer w0.254: R18.2@14.776,41.88 R18.2
  Top Layer w0.4: Q1.1@12.809,39.913 R18.2@14.776,41.88
PWM_Coil: R6.1 R7.2 U3.42 | length 24.5
  Top Layer w0.254: R7.2 16.04,19.482 18.034,21.476 18.034,32.258 19.304,33.528 20.32,33.528 21.844,32.004 21.844,31.332 U3.42
  Top Layer w0.3: R6.1 R7.2
PWM_Fan: R18.1 R19.2 U3.21 | length 18.9
  Top Layer w0.254: R19.2@15.582,45.3 16.51,46.228 19.354,46.228 27.051,38.531 27.051,37.953 U3.21
  Top Layer w0.4: R18.1 R19.2
Reset/SBW_TDIO: C7.2 J2.4 R3.1 U3.5 | length 34.7
  Top Layer w0.254: v1(20.32,28.067) 20.32,27.082 30.148,17.254 30.148,16.258 C7.2 ; v1(23.876,31.369) 25.446,31.369 U3.5
  Top Layer w0.4: J2.4 29.821,7.215 30.277,7.671 R3.1 C7.2
  Bottom Layer w0.254: v1(20.32,28.067) 20.32,28.081 23.541,31.303 23.81,31.303 v1(23.876,31.369)
SBW_TCK: J2.3 U3.4 | length 36.9
  Top Layer w0.254: v1(21.336,27.051) 21.336,26.981 31.423,16.893 31.423,6.009 30.206,4.792 29.033,4.792 28.832,4.994 J2.3@28.832,6.095 ; v1(24.257,30.607) 25.501,30.607 U3.4
  Bottom Layer w0.254: v1(21.336,27.051) 21.382,27.097 21.382,27.732 v1(24.257,30.607)
UCA1_CLK: H3.3
UCA1_RX/MISO: H3.2 U3.24 | length 28.4
  Top Layer w0.254: U3.24 22.606,35.629 22.606,31.369 24.358,29.617 24.358,27.903 34.372,17.89 H3.2
UCA1_STE: H3.4
UCA1_TX/MOSI: H3.1 U3.23 | length 35.1
  Top Layer w0.254: U3.23 25.146,37.462 25.146,36.592 28.177,33.561 29.283,33.561 32.552,36.83 36.361,36.83 37.18,36.011 37.18,30.195 36.436,29.451 36.101,29.451 34.219,27.569 34.219,21.407 35.196,20.43 H3.1
UCB0_CLK: H6.2
UCB0_SCL/MISO: H6.4 I2C.1 R1.1 U1.13 U2.2 U3.48 | length 85.8
  Top Layer w0.254: I2C.1@15.568,50.723 16.089,50.921 cw(c22.73,44.823) 22.735,53.839 ; I2C.1 I2C.1@15.748,50.419 ; U2.2 22.733,51.177 23.368,51.812 23.368,53.34 23.867,53.839 ; 22.736,53.839 23.867,53.839 ; U3.48 23.155,28.155 23.155,28.105 23.155,28.096 ccw(c24.034,28.152) 23.412,27.529 23.413,27.528 34.055,16.886 37.09,16.886 37.648,17.444 37.648,26.091 38.305,26.748 38.95,26.748 39.661,27.459 39.661,35.705 ; U1.13 26.543,53.771 26.611,53.839 ; H6.4 39.627,35.67 39.661,35.705 ; 23.867,53.839 26.611,53.839 ; 26.611,53.839 29.346,53.839 32.004,51.181 32.004,46.863 33.655,45.212 38.608,45.212 39.656,44.164 39.656,44.096 39.661,44.091 39.661,35.705
UCB0_SDA/MOSI: H6.3 I2C.2 R2.1 U1.14 U2.4 U3.1 | length 76.4
  Top Layer w0.254: I2C.2@16.436,48.337 16.488,48.388 16.488,49.254 20.069,52.835 v1(21.414,52.835) 21.46,52.789 21.46,51.942 U2.4 ; v1(25.405,52.379) 25.499,52.379 25.634,52.514 25.923,52.514 26.043,52.394 U1.14 ; U3.1 34.869,19.118 36.771,19.118 37.199,19.546 37.199,21.221 36.743,21.677 35.677,21.677 34.863,22.491 34.863,25.844 35.868,26.849 37.033,26.849 37.678,27.494 37.678,44.055 37.168,44.565 33.415,44.565 31.426,46.554 31.426,50.235 29.217,52.444 27.744,52.444 v1(27.732,52.432) ; 37.715,38.227 H6.3@38.68,38.227
  Bottom Layer w0.254: v1(21.414,52.835) 22.274,52.835 22.289,52.85 24.884,52.85 25.355,52.379 v1(25.405,52.379) 25.432,52.405 27.706,52.405 v1(27.732,52.432)
UCB0_STE: H6.1
UCB1_CLK: H5.2 H10.2 U3.14 | length 10.8
  Top Layer w0.254: U3.14@28.963,34.925 28.963,34.931 33.578,39.546 H10.2 34.258,41.402 35.505,41.402 H5.2
UCB1_MISO/SCL: H5.4 H10.4 U3.12 | length 8.2
  Top Layer w0.254: U3.12@29.316,32.485 32.473,35.642 H10.4 33.592,35.656 36.143,35.656 H5.4
UCB1_MOSI/SDA: H5.3 H10.3 U3.13 | length 8.3
  Top Layer w0.254: U3.13@29.316,34.571 32.753,38.008 33.404,38.008 33.592,38.196 36.143,38.196 H5.3
UCB1_STE: H5.1 H10.1 U3.15 | length 12.6
  Top Layer w0.254: U3.15@28.609,35.278 32.512,39.181 32.512,42.196 H10.1 36.129,43.262 H5.1
V_Coil: Fuse.2 H8.1 H8.2 H8.3 H9.1 H9.2 H9.3 R11.2
VBAT: H1.5
VBAT_TEMP: "Bat Temp.2" C9.2 R16.2 U3.34 | length 16.7
  Top Layer w0.254: C9.2@16.023,34.972 16.423,34.572 17.511,34.572 18.877,35.938 19.456,35.938 20.139,35.255 U3.34
  Top Layer w0.4: 5.842,39.624 8.128,37.338 13.633,37.338 14.043,36.927 R16.2@14.067,36.927 ; R16.2@14.398,36.529 C9.2
VCHA_TEMP: "Cham Temp.2" C10.2 R17.2 U3.43 | length 37.5
  Top Layer w0.254: U3.43 19.717,28.497 19.717,26.003 27.419,18.301 27.419,9.001 25.606,7.189 C10.2
  Top Layer w0.4: 16.51,5.842 17.78,5.842 19.127,7.189 R17.2 C10.2
Vim: IC1.1 IC1.5 R9.2 | length 7.5
  Top Layer w0.3: IC1.1 22.647,14.945 24.59,13.002 25.792,13.002 IC1.5 25.729,12.995 25.654,12.92 25.654,10.998 R9.2
Vim_Buff: C8.2 R15.2 U3.40 | length 15.6
  Top Layer w0.254: U3.40 18.923,29.825 18.923,25.527 20.574,23.876 20.574,19.558 R15.2@20.574,17.128
pads on no net: H1.1 H1.4 H2.3 H4.1 H4.2 H4.3 H4.4 U3.2 U3.3 U3.8 U3.9 U3.22 U3.25 U3.26 U3.27 U3.31 U3.32 U3.33 U3.35 U3.36 U3.37 U3.38 U3.39 U3.41 U3.44 U3.47

## Polygon pours and split planes (outlines as drawn)
GND on Top Layer "GND_L01_P021" (solid, pour order 21): 47.646,8.05 cw(c28.05,28.05) 47.646,48.05 47.65,48.05 40.963,48.05 40.963,8.05
NetD3_A on Top Layer "NETD3_A_L01_P019" (solid, pour order 19): 9.916,21.287 5.315,21.331 0.254,21.287 0.254,17.526 4.318,13.462 7.734,13.462 7.734,17.178 9.916,18.503
Isense on Top Layer "ISENSE_L01_P018" (solid, pour order 18): 7.944,16.631 18.154,16.631 18.154,13.719 15.953,13.719 15.953,13.462 7.944,13.462
NetD3_C on Top Layer "NETD3_C_L01_P017" (solid, pour order 17): 12.954,21.398 0,21.398 0,23.952 9.696,23.952 10.378,23.622 12.954,23.622
V_Coil on Top Layer "V_COIL_L01_P016" (solid, pour order 16): 10.439,23.825 9.852,24.13 6.35,24.13 6.35,35.56 13.453,35.56 17.013,31.999 17.013,23.825
GND on Bottom Layer "GND_L02_P015" (solid, pour order 15): 47.646,8.05 cw(c28.05,28.05) 47.646,48.05 47.65,48.05 40.963,48.05 40.963,8.05

## Silkscreen, mask and mechanical layers (free items; w line width, h text height)
Top Overlay:
  text "CTRL Freaks MCU V2.0" at 13.79,22.375 h0.8
Bottom Overlay:
  drawing of 56 lines, arcs and shapes, not listed
Board Outline:
  lines w0.1: 40.939,8.026 40.939,48.026 ; 40.963,8.05 47.646,8.05 cw(c28.05,28.05) 47.646,48.05 47.65,48.05 40.963,48.05 40.963,8.05